# Altium PCB 第五版.pcbdoc
Units mm, origin at the board's own origin, x right, y up, seen from the top; angles counter-clockwise.
Board outline 187.55 x 125.98 mm, 2 copper layers (Top Layer, Bottom Layer); 78 components, 111 nets, 257 pads, 47 vias.
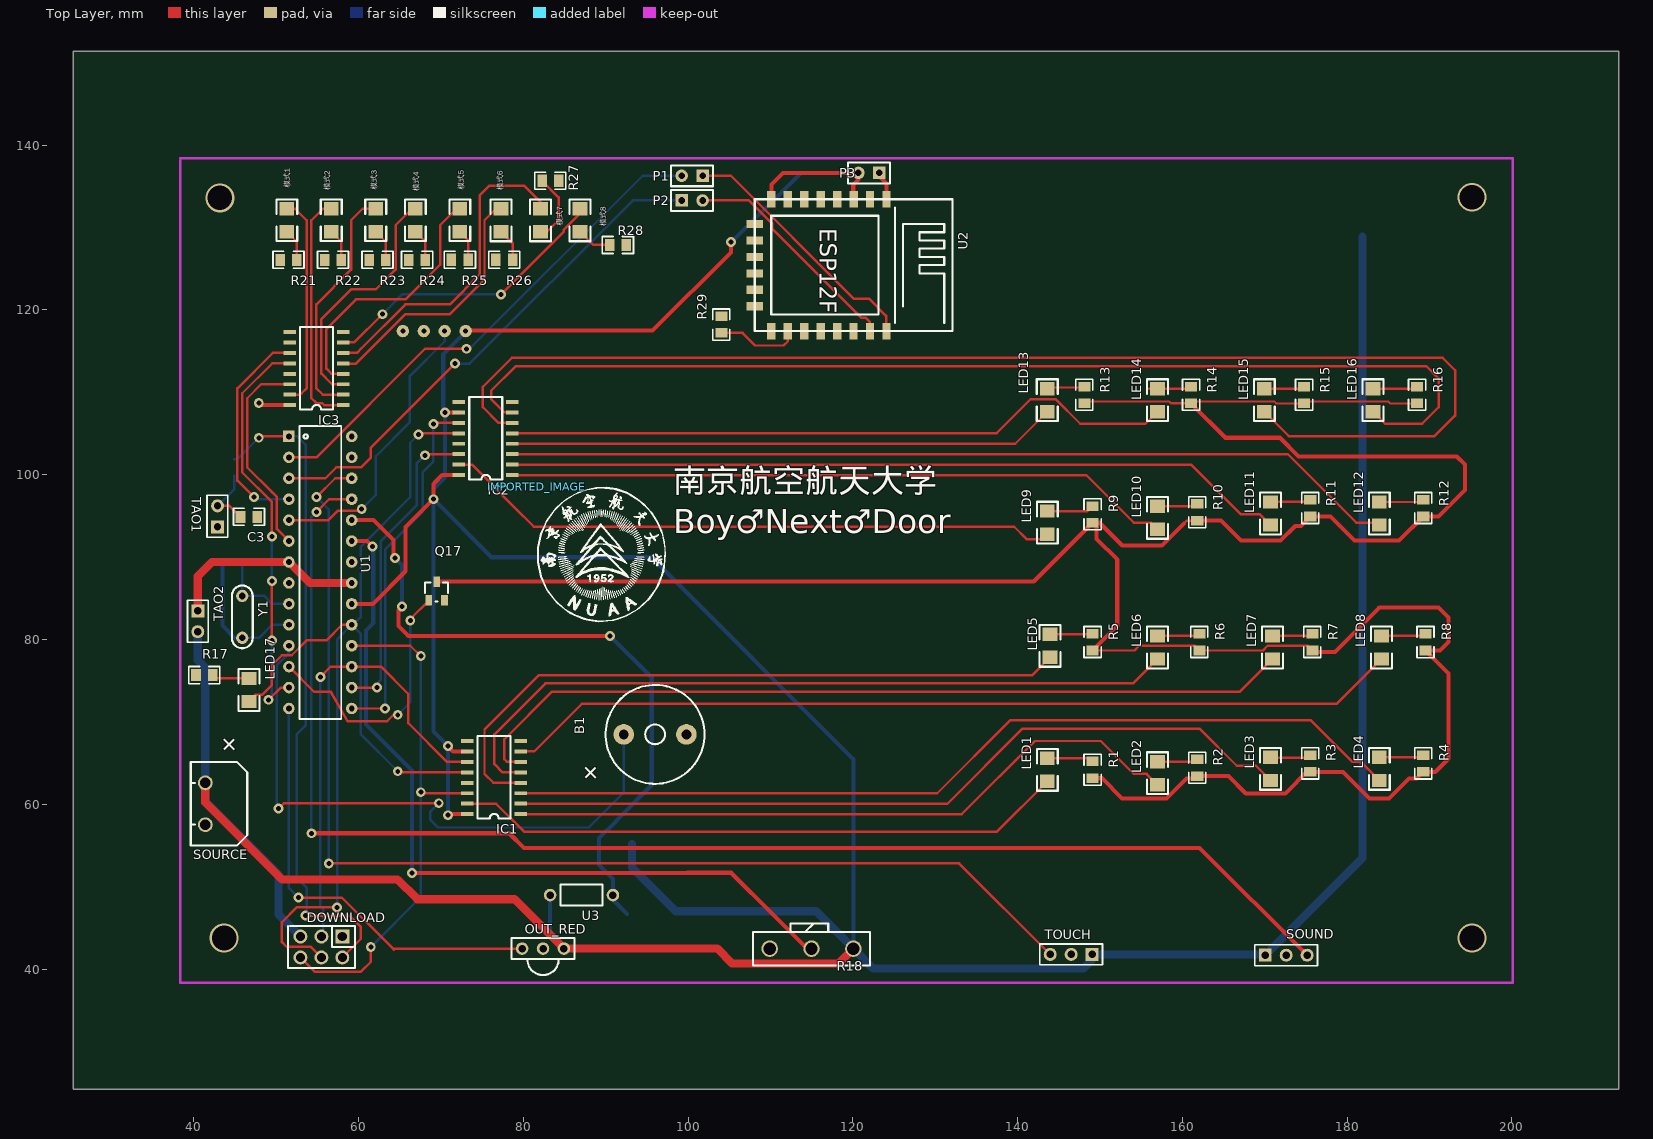
[diagram p0: Top Layer view]
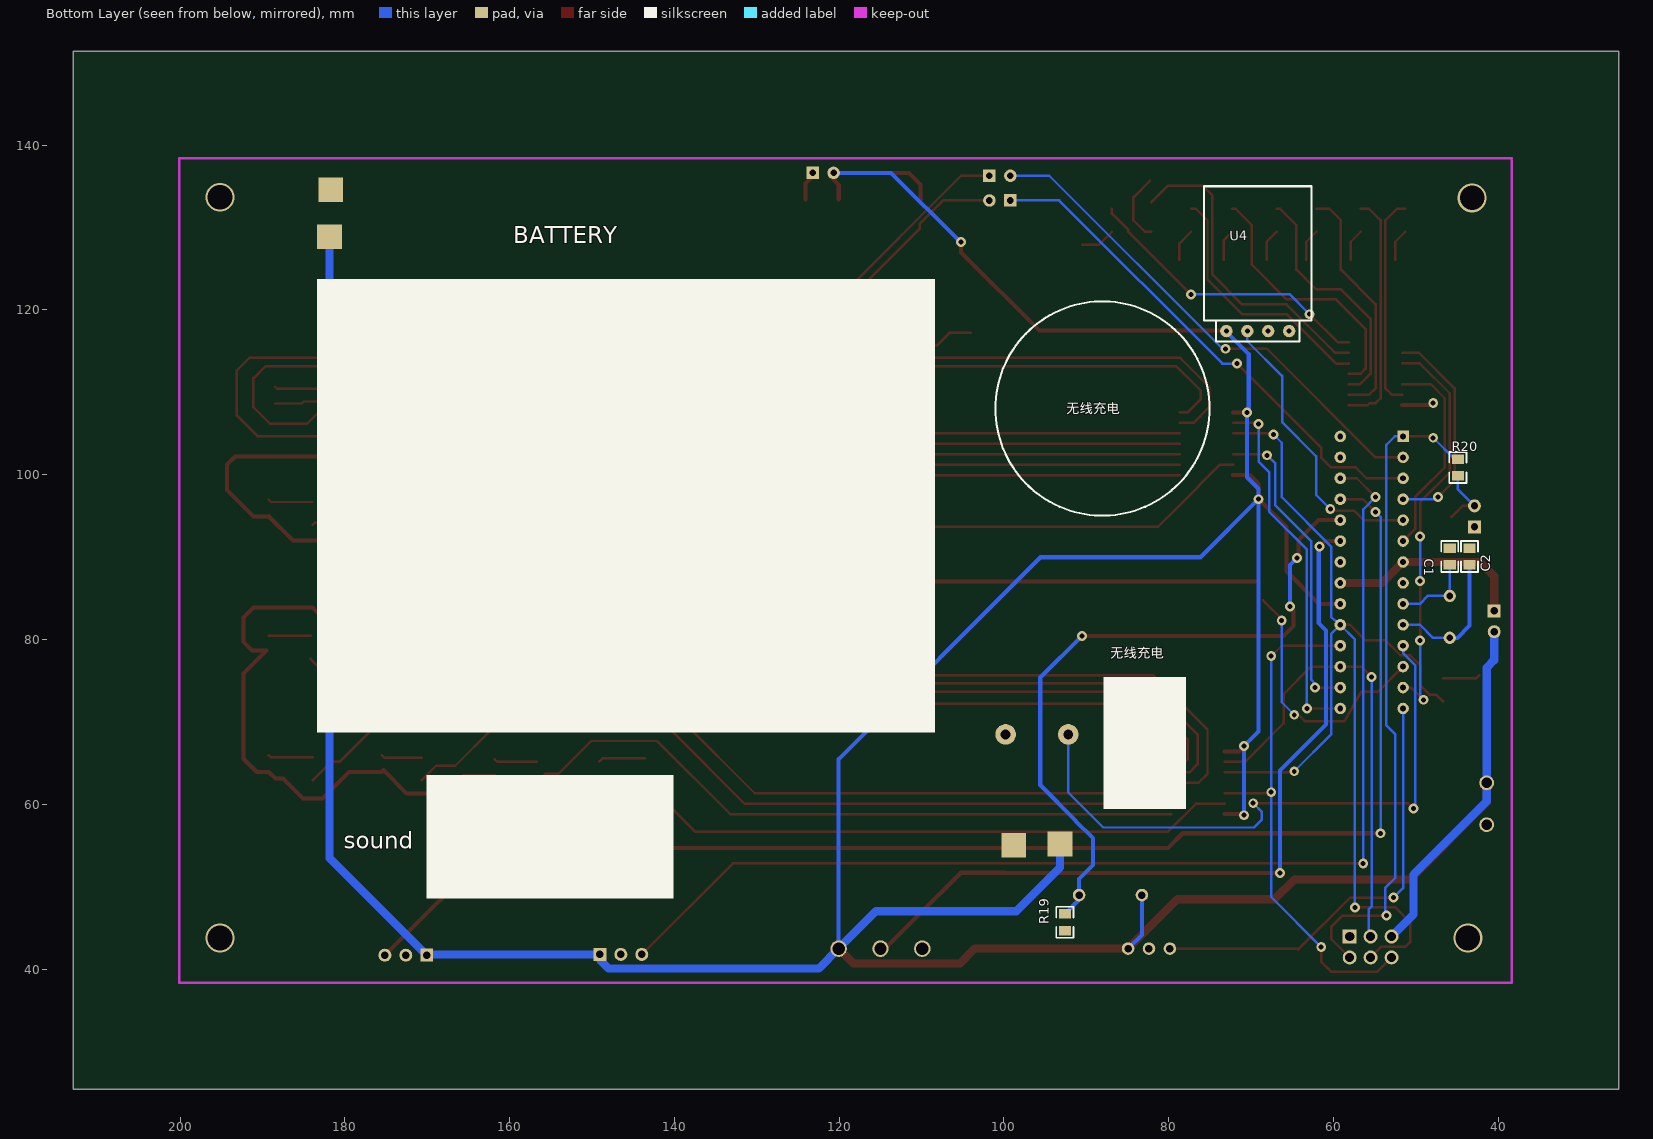
[diagram p1: Bottom Layer view, seen from below]

## Layer stack, top to bottom
Top Layer: signal copper (thickness not stored)
Dielectric: dielectric 0.32, FR-4, Dk 4.8
Bottom Layer: signal copper (thickness not stored)

## Board outline
212.949,25.4 25.4,25.4 25.4,151.382 212.949,151.382

## Components (designator, comment, footprint, x,y, rotation, side; value= is the part's Value field where it differs from the comment)
B1 "_" 蜂鸣器 96.002,68.483 r90 top
C1 "22p" 0805#1 45.901,90.083 r270 bottom
C2 "22p" 0805#1 43.5,90.083 r270 bottom
C3 "100nF" 0805#2 46.702,94.883 r180 top
DOWNLOAD "M_2.54_2*3P_JX" DIP-2X3P2.54 55.5,42.684 r180 top
IC1 "74HC595" SOP16L#1 76.454,63.246 r180 top
IC2 "74HC595" SOP16L#1 75.438,104.394 r180 top
IC3 "74HC595" SOP16L#2 54.9,112.884 r180 top
IMPORTED_IMAGE "IMPORTED_IMAGE" IMPORTED_IMAGE 81.631,98.547 r0 top
LED1 "_" 1206#1 143.602,64.183 r90 top
LED2 "_" 1206#1 156.977,63.771 r90 top
LED3 "_" 1206#1 170.692,64.302 r90 top
LED4 "_" 1206#1 183.9,64.302 r90 top
LED5 "_" 1206#1 143.947,79.238 r90 top
LED6 "_" 1206#1 156.977,79.04 r90 top
LED7 "_" 1206#1 170.947,79.04 r90 top
LED8 "_" 1206#1 184.155,79.04 r90 top
LED9 "_" 1206#1 143.602,94.183 r90 top
LED10 "_" 1206#1 156.977,94.772 r90 top
LED11 "_" 1206#1 170.693,95.303 r90 top
LED12 "_" 1206#1 183.901,95.303 r90 top
LED13 "_" 1206#1 143.6,109.042 r90 top
LED14 "_" 1206#1 156.977,109.042 r90 top
LED15 "_" 1206#1 169.944,109.042 r90 top
LED16 "_" 1206#1 183.152,109.042 r90 top
LED17 "led-3" 1206#1 46.702,73.883 r90 top
OUT_RED "HS0038B3VM" HS0038B3VM 82.402,42.483 r0 top
P1 "RX" 2.54-1*2P_TIGHT_JX#1 100.5,136.284 r180 top
P2 "TX" 2.54-1*2P_TIGHT_JX#2 100.5,133.284 r0 top
P3 "REST" 2.54-1*2P_TIGHT_JX#3 121.95,136.634 r180 top
Q17 "AO3400" SOT-23 69.502,85.883 r0 top
R1 "220" 0805#2 149.102,64.183 r270 top
R2 "220" 0805#2 161.802,64.437 r270 top
R3 "220" 0805#2 175.518,64.945 r270 top
R4 "220" 0805#2 189.234,64.945 r270 top
R5 "220" 0805#2 149.102,79.683 r270 top
R6 "220" 0805#2 162.056,79.682 r270 top
R7 "220" 0805#2 175.772,79.682 r270 top
R8 "220" 0805#2 189.504,79.681 r270 top
R9 "220" 0805#3 149.102,95.183 r270 top
R10 "220" 0805#3 161.802,95.437 r270 top
R11 "220" 0805#3 175.518,95.945 r270 top
R12 "220" 0805#3 189.234,95.945 r270 top
R13 "220" 0805#3 148.1,109.684 r270 top
R14 "220" 0805#3 161.054,109.684 r270 top
R15 "220" 0805#3 174.77,109.684 r270 top
R16 "220" 0805#3 188.486,109.684 r270 top
R17 "220" 0805#2 41.302,75.683 r0 top
R18 "100k" 单联电位器 112.452,42.483 r180 top
R19 "47k" 0805#4 92.6,45.684 r270 bottom
R20 "10k" 0805#1 44.902,100.883 r270 bottom
R21 "220" 0805#2 51.502,126.083 r180 top
R22 "220" 0805#2 56.902,126.083 r180 top
R23 "220" 0805#2 62.302,126.083 r180 top
R24 "220" 0805#3 67.102,126.083 r180 top
R25 "220" 0805#2 72.3,126.084 r180 top
R26 "220" 0805#2 77.7,126.084 r180 top
R27 "220" 0805#2 83.302,135.682 r0 top
R28 "220" 0805#2 91.5,127.884 r0 top
R29 "4.7k" 0805#5 104.05,118.234 r90 top
SOUND "Header-Male-2.54_1x3" HDR-3X1/2.54 172.6,41.684 r0 top
SOURCE "WJ2EDGVC-5.08-2P" 接线端子 46.5,57.684 r270 top
TAO1 "Header-Female-2.54_1x2" HDR-1X2/2.54#1 42.9,93.684 r90 top
TAO2 "Header-Female-2.54_1x2" HDR-1X2/2.54#2 40.5,83.484 r270 top
TOUCH "Header-Male-2.54_1x3" HDR-3X1/2.54 146.502,41.783 r180 top
U1 "ATMEGA328P-PU" DIP28-300 55.371,88.138 r270 top
U2 "ESP-12F(ESP8266MOD)" ESP-12F(ESP8266MOD) 116.1,125.434 r270 top
U3 "_" 电阻 88.35,48.984 r0 top
U4 "DHT11" DHT11_JX 69.2,117.434 r0 bottom
Y1 "16M" 晶振 45.9,85.284 r270 top
模式1 "_" 1206#2 51.3,130.884 r270 top (schematic designator ģʽ1)
模式2 "_" 1206#2 56.7,130.884 r270 top (schematic designator ģʽ2)
模式3 "_" 1206#2 62.1,130.884 r270 top (schematic designator ģʽ3)
模式4 "_" 1206#2 66.901,130.884 r270 top (schematic designator ģʽ4)
模式5 "_" 1206#2 72.301,130.884 r270 top (schematic designator ģʽ5)
模式6 "_" 1206#2 77.302,130.881 r270 top (schematic designator ģʽ6)
模式7 "_" 1206#2 82.103,130.881 r270 top (schematic designator ģʽ7)
模式8 "_" 1206#2 86.901,130.881 r270 top (schematic designator ģʽ8)

## Footprints (in the part's own frame and the unit in brackets; to place one, negate y for a bottom-side part, rotate by r counter-clockwise, add the part's x,y. Pads: shape width x height; smd on the part's side, far side on the other; paste and mask are expansions set on the pad)
2.54-1*2P_TIGHT_JX#1 [mm]
  rect 1.52x1.52 hole 0.81: 1(-1.269,0.002)
  round 1.52 hole 0.81: 2(1.27,0)
  silkscreen extent -2.54,-1.27 2.54,1.27
2.54-1*2P_TIGHT_JX#2 [mm]
  rect 1.52x1.52 hole 0.81: 1(-1.271,0)
  round 1.52 hole 0.81: 2(1.27,0)
  silkscreen extent -2.54,-1.27 2.54,1.27
2.54-1*2P_TIGHT_JX#3 [mm]
  rect 1.52x1.52 hole 0.81: 1(-1.269,-0.001)
  round 1.52 hole 0.81: 2(1.27,0)
  silkscreen extent -2.54,-1.27 2.54,1.27
0805#1 [mm]
  rect 1.16x1.47 smd: 1(1.017,-0.001) 2(-1.015,-0.001)
  silkscreen extent -1.87,-1.04 1.9,1.03
0805#2 [mm]
  rect 1.16x1.47 smd: 1(-1.016,0) 2(1.016,0)
  silkscreen extent -1.9,-1.04 1.87,1.03
0805#3 [mm]
  rect 1.16x1.47 smd: 1(-1.017,0.001) 2(1.015,0.001)
  silkscreen extent -1.9,-1.03 1.87,1.04
0805#4 [mm]
  rect 1.16x1.47 smd: 1(1.015,0) 2(-1.017,0)
  silkscreen extent -1.88,-1.04 1.9,1.03
0805#5 [mm]
  rect 1.16x1.47 smd: 1(-1.016,0.002) 2(1.016,0.002)
  silkscreen extent -1.9,-1.03 1.87,1.04
1206#1 [mil]
  rect 63x70.9 smd: 1(-55.01,-0.01) 2(54.99,-0.01)
  silkscreen extent -100,-50 100,50
1206#2 [mil]
  rect 63x70.9 smd: 1(-55,0.05) 2(55,0.05)
  silkscreen extent -100,-50 100,50
DHT11_JX [mm]
  round 1.5 hole 0.6: 1(3.81,0) 2(1.27,0) 3(-1.27,0) 4(-3.81,0)
  silkscreen extent -6.51,-17.58 6.51,1.27
DIP28-300 [mil]
  rect 55x55 hole 28: 1(-650.02,-149.96)
  round 55 hole 28: 2(-550,-150) 3(-450,-150) 4(-350,-150) 5(-250,-150) 6(-150,-150) 7(-50,-150) 8(50,-150) 9(150,-150) 10(250,-150) 11(350,-150) 12(450,-150) 13(550,-150) 14(650,-150) 15(650,150) 16(550,150) 17(450,150) 18(350,150) 19(250,150) 20(150,150) 21(50,150) 22(-50,150) 23(-150,150) 24(-250,150) 25(-350,150) 26(-450,150) 27(-550,150) 28(-650,150)
  silkscreen extent -700,-100 700,100
DIP-2X3P2.54 [mm]
  rect 1.7x1.7 hole 1.1: 1(-2.538,-1.269)
  round 1.7 hole 1.1: 2(-2.54,1.27) 3(0,-1.27) 4(0,1.27) 5(2.54,-1.27) 6(2.54,1.27)
  silkscreen extent -4.06,-2.54 4.06,2.54
ESP-12F(ESP8266MOD) [mm]
  rect 2x1 smd: 1(-8.001,8.001) 2(-8.001,6.002) 3(-8.001,4.002) 4(-8.001,2.001) 5(-8.001,0) 6(-8.001,-1.999) 7(-8.001,-3.998) 8(-8.001,-6) 15(7.999,-6.005) 16(8,-4.001) 17(8.003,-2.002) 18(8.001,-0.002) 19(8,1.999) 20(8.001,3.998) 21(8.001,5.999) 22(8.001,7.998)
  rect 1x2 smd: 9(-5,-8) 10(-3.002,-7.999) 11(-1.003,-7.999) 12(0.999,-7.999) 13(2.998,-7.999) 14(4.997,-8)
  silkscreen extent -8,-8 8,16
HDR-1X2/2.54#1 [mil]
  rect 62x62 hole 35: 1(-0.05,0.08)
  round 62 hole 35: 2(100,0.01)
  silkscreen extent -50,-49 150,50
HDR-1X2/2.54#2 [mil]
  rect 62x62 hole 35: 1(-0.02,0.01)
  round 62 hole 35: 2(100,0)
  silkscreen extent -50,-49 150,50
HDR-3X1/2.54 [mil]
  rect 62x62 hole 35: 1(-100.01,-0.04)
  round 62 hole 35: 2(0.01,0) 3(100.01,0)
  silkscreen extent -150,-50 150,50
HS0038B3VM [mil]
  round 60 hole 36: 1(-100,0) 2(0,0) 3(100,0)
  silkscreen extent -150,-126 150,50
IMPORTED_IMAGE [mm]
  silkscreen extent 0.04,-16.43 15.69,0
SOP16L#1 [mm]
  rect 1.52x0.48 smd: 1(-3.239,4.444) 2(-3.239,3.174) 3(-3.239,1.906) 4(-3.239,0.636) 5(-3.239,-0.634) 6(-3.239,-1.904) 7(-3.239,-3.174) 8(-3.239,-4.444) 9(3.238,-4.444) 10(3.238,-3.174) 11(3.238,-1.904) 12(3.238,-0.634) 13(3.238,0.636) 14(3.238,1.906) 15(3.238,3.176) 16(3.238,4.444)
  silkscreen extent -2.02,-5.05 1.99,4.95
SOP16L#2 [mm]
  rect 1.52x0.48 smd: 1(-3.238,4.445) 2(-3.238,3.175) 3(-3.238,1.905) 4(-3.238,0.635) 5(-3.238,-0.635) 6(-3.238,-1.905) 7(-3.238,-3.175) 8(-3.238,-4.445) 9(3.239,-4.445) 10(3.239,-3.175) 11(3.239,-1.905) 12(3.239,-0.635) 13(3.239,0.635) 14(3.239,1.905) 15(3.239,3.175) 16(3.239,4.445)
  silkscreen extent -2.02,-5.05 1.99,4.95
SOT-23 [mm]
  rect 0.81x1.27 smd: 1(-0.952,-1.143) 2(0.953,-1.143) 3(-0.013,1.143)
  silkscreen extent -1.41,-1.27 1.38,1.02
单联电位器 [mm]
  round 2 hole 1.5: 1(-7.62,0) 2(-2.54,0) 3(2.54,0)
  silkscreen extent -9.65,-3.05 4.57,2.03
接线端子 [mm]
  round 1.8 hole 1.25: 1(-4.92,-5.08) 2(0.16,-5.08)
  silkscreen extent -7.46,-6.86 2.7,0
晶振 [mm]
  round 1.5 hole 0.8: 1(0,0) 2(5.08,0)
  silkscreen extent -1.27,-1.27 6.35,1.27
电阻 [mil]
  round 60 hole 36: 1(-200,0) 2(100,0)
  silkscreen extent -150,-50 50,50
蜂鸣器 [mm]
  round 2.5 hole 1.199: 1(0,3.8) 2(0,-3.8)
  silkscreen extent -6,-6 6,6

## Free pads (board coordinates)
  rect 3x3 smd far side: 2(93.201,55.183) 2(98.801,55.035) 2(181.703,134.583) 2(181.851,128.883)

## Via types
v1: diameter 1.2, hole 0.605, Top Layer to Bottom Layer, 41 vias
v2: diameter 3.5, hole 3, Top Layer to Bottom Layer, 4 vias
v3: diameter 1.2, hole 0.6, Top Layer to Bottom Layer, 2 vias

## Nets (pads, with @x,y where several pads share a name; then routed paths per layer and width w, separated by ;. In a path a pad name is that pad's centre, name@x,y a point inside that pad or via, vN(x,y) a via of type N, cw(c..) or ccw(c..) an arc to the next point about the centre after c; other vN are vias at no path point)
+5V: DOWNLOAD.5 IC1.10 IC1.16 IC2.10 IC2.16 IC3.10 IC3.16 OUT_RED.3 P3.2 pad.2@93.201,55.183 pad.2@181.851,128.883 R18.1 SOUND.1 SOURCE.1 TAO2.2 TOUCH.1 U1.20 U2.3 U2.8 U3.1 U4.1 | length 573.1
  Top Layer w0.5: v1(47.902,108.683) 48.146,108.44 IC3.16@51.661,108.44 ; U1.20 61.742,84.328 65.7,88.285 65.7,93.64 v1(69.088,97.028) ; v1@69.299,97.239 v1(69.088,97.028) ; v1@70.358,107.442 v1(70.485,107.569) IC2.10 ; v1(70.866,58.674) 70.993,58.801 IC1.16 ; v1(70.866,67.056) 71.501,66.421 IC1.10 ; IC2.16 70.165,99.949 69.299,99.083 69.088,98.872 v1(69.088,97.028) ; U4.1 73.06,117.484 95.7,117.484 105.202,126.986 v1(105.202,128.232) ; U2.8@110.1,133.435 110.15,133.486 110.15,135.234 111.55,136.634 P3.2 120.68,135.814 120.05,135.184 120.05,133.486 U2.3@120.101,133.435
  Top Layer w1: SOURCE.1 41.42,60.214 50.75,50.884 64.75,50.884 67.15,48.484 78.941,48.484 OUT_RED.3 ; OUT_RED.3@84.942,42.483 103.551,42.483 105.35,40.684 118.273,40.684 R18.1@120.072,42.483
  Bottom Layer w0.5: v1(70.866,58.674) v1(70.866,67.056) 69.088,68.834 v1(69.088,97.028) ; U4.1 73.01,117.344 70.3,114.634 70.3,107.754 v1(70.485,107.569) 70.485,99.695 69.088,98.298 v1(69.088,97.028) ; U3.1 83.27,44.155 OUT_RED.3@84.942,42.483 ; v1(105.202,128.232) 105.298,128.232 113.7,136.634 P3.2 ; R18.1@120.072,42.483 120.072,65.462 95.55,89.984 76.132,89.984 v1(69.088,97.028)
  Bottom Layer w1: TAO2.2 40.5,77.485 41.42,76.563 SOURCE.1 41.42,60.401 41.402,60.383 50.292,51.493 50.292,46.622 DOWNLOAD.5 ; pad.2@93.2,55.184 93.2,52.334 98.501,47.033 113.149,47.033 115.522,47.033 120.071,42.481 122.471,40.084 147.998,40.084 149.042,41.128 TOUCH.1 169.959,41.783 SOUND.1 ; SOUND.1 181.85,53.473 pad.2@181.85,128.884
BUTTON: TOUCH.3 U1.26 | length 142.4
  Top Layer w0.3: v1(54.9,97.284) 57.183,99.568 U1.26 ; v1(56.402,52.833) 132.912,52.833 TOUCH.3
  Bottom Layer w0.3: v1(54.9,97.284) 56.402,95.782 v1(56.402,52.833)
CLK_1: DOWNLOAD.3 IC1.11 U1.17 | length 57.1
  Top Layer w0.3: v1(55.372,75.438) 56.642,76.708 U1.17 62.738,76.708 66.04,73.406 66.04,69.85 70.739,65.151 IC1.11
  Bottom Layer w0.3: v1(55.372,75.438) 55.372,47.612 55.702,47.282 55.702,43.955 DOWNLOAD.3
CLK_2: IC2.11 U1.15 | length 44.2
  Top Layer w0.3: U1.15 v1(63.246,71.628) ; v1(69.088,106.172) 69.215,106.299 IC2.11
  Bottom Layer w0.3: v1(63.246,71.628) 63.246,88.138 63.246,89.154 63.246,90.932 67.818,95.504 67.818,100.33 69.088,101.6 v1(69.088,106.172)
CLK_3: IC3.11 U1.4 | length 26.5
  Top Layer w0.3: v1(47.302,97.283) 45.301,99.284 45.301,110.485 49.604,114.788 IC3.11
  Bottom Layer w0.3: v1(47.302,97.283) 47.556,97.028 U1.4
DATA_1: DOWNLOAD.6 IC1.14 U1.18 | length 64
  Top Layer w0.3: DOWNLOAD.6 54.689,39.685 60.3,39.685 61.501,40.884 v3(61.5,42.684) ; U1.18 66.294,79.248 v1(67.564,77.978) ; v1(67.564,61.468) 67.691,61.341 IC1.14
  Bottom Layer w0.3: v3(61.5,42.684) 67.564,48.748 v1(67.564,61.468) v1(67.564,77.978)
DATA_2: IC2.14 U1.16 | length 37.8
  Top Layer w0.3: U1.16 v1(62.23,74.168) ; v1(68.072,102.362) 68.199,102.489 IC2.14
  Bottom Layer w0.3: v1(62.23,74.168) 62.23,74.615 62.7,75.085 62.7,91.91 67.056,96.266 67.056,101.346 v1(68.072,102.362)
DATA_3: IC3.14 U1.6 | length 25.3
  Top Layer w0.3: U1.6 50.099,93.408 50.099,97.285 49.5,97.884 46.5,100.884 46.5,104.483 46.5,109.283 48.194,110.978 IC3.14
DHT11: U1.5 U4.2 | length 35.2
  Top Layer w0.3: U1.5 56.353,94.487 57.5,95.634 60.2,95.634 v1(60.4,95.834)
  Bottom Layer w0.3: v1(60.4,95.834) 62.1,97.534 62.1,102.234 66.25,106.384 66.25,111.984 70.47,116.204 U4.2
GND: B1.2 C1.2 C2.2 C3.1 DOWNLOAD.1 IC1.8 IC1.13 IC2.8 IC2.13 IC3.8 IC3.13 OUT_RED.2 pad.2@98.801,55.035 pad.2@181.703,134.583 Q17.2 R17.1 R18.3 R19.1 R21.2 R22.2 R23.2 R24.2 R25.2 R26.2 R27.2 R28.2 R29.2 SOUND.2 SOURCE.2 TAO1.1 TOUCH.2 U1.8 U1.22 U2.15 U4.4
IC1_9: IC1.9
IC2_9: IC2.9
IC3_9: IC3.9
L1: IC1.15 LED1.1 | length 74.3
  Top Layer w0.3: IC1.15 76.714,60.07 80.1,56.684 137.5,56.684 LED1.1
L2: IC1.1 LED2.1 | length 83.2
  Top Layer w0.3: IC1.1 133.218,58.801 142.1,67.683 150.099,67.683 154.099,63.685 155.666,63.685 LED2.1
L3: IC1.2 LED3.1 | length 97.4
  Top Layer w0.3: IC1.2 102.911,60.071 131.486,60.071 140.599,69.185 162.1,69.185 166.599,64.684 168.913,64.684 LED3.1
L4: IC1.3 LED4.1 | length 110.9
  Top Layer w0.3: IC1.3@79.692,61.338 116.045,61.338 130.254,61.338 139.101,70.185 175.6,70.185 180.599,65.184 181.62,65.184 LED4.1
L5: IC1.4 LED5.1 | length 82.5
  Top Layer w0.3: IC1.4 76.375,62.611 75.301,63.685 75.301,69.083 81.892,75.684 85.184,75.684 141.79,75.684 LED5.1
L6: IC1.5 LED6.1 | length 91.8
  Top Layer w0.3: IC1.5 77.503,63.881 76.5,64.884 76.5,68.483 82.7,74.684 96.901,74.684 ; 96.599,74.684 154.018,74.684 LED6.1
L7: IC1.6 LED7.1 | length 101.8
  Top Layer w0.3: IC1.6@79.692,65.148 78.034,65.148 77.701,65.484 77.701,67.884 83.5,73.683 109.982,73.683 166.987,73.683 LED7.1
L8: IC1.7 LED8.1 | length 109.1
  Top Layer w0.3: IC1.7 81.335,66.42 87.1,72.184 178.696,72.184 LED8.1
L9: IC2.15 LED9.1 | length 75.4
  Top Layer w0.3: IC2.15 73.767,101.219 78.9,96.083 81.3,93.683 139.601,93.683 141.1,92.184 143,92.184 LED9.1
L10: IC2.1 LED10.1 | length 81
  Top Layer w0.3: IC2.1 148.334,99.95 154.1,94.184 156.168,94.184 LED10.1
L11: IC2.2 LED11.1 | length 95
  Top Layer w0.3: IC2.2 161.064,101.22 167.1,95.184 169.415,95.184 LED11.1
L12: IC2.3 LED12.1 | length 108.8
  Top Layer w0.3: IC2.3 172.796,102.488 181.1,94.184 183.623,94.184 LED12.1
L13: IC2.4 LED13.1 | length 66.5
  Top Layer w0.3: IC2.4 139.712,103.758 LED13.1
L14: IC2.5 LED14.1 | length 81.9
  Top Layer w0.3: IC2.5 137.444,105.029 141.6,109.184 144.6,109.184 147.599,106.185 155.517,106.185 LED14.1
L15: IC2.6 LED15.1 | length 157.8
  Top Layer w0.3: IC2.6 76.987,106.299 75.1,108.184 75.1,110.683 78.6,114.183 191.6,114.183 193.098,112.685 193.098,107.183 190.599,104.684 172.905,104.684 LED15.1
L16: IC2.7 LED16.1 | length 134
  Top Layer w0.3: IC2.7 77.716,107.569 76.101,109.184 76.101,110.185 79.101,113.185 189.601,113.185 191.099,111.684 191.099,108.184 189.1,106.185 184.612,106.185 LED16.1
L17: IC3.15 模式1.1 | length 25.7
  Top Layer w0.3: 模式1.1@51.3,132.281 52.304,132.281 53.701,130.884 53.701,110.485 53.101,109.883 52.926,109.708 IC3.15
L18: IC3.1 模式2.1 | length 28.8
  Top Layer w0.3: 模式2.1@56.7,132.281 55.697,132.281 54.3,130.884 54.3,109.283 54.9,108.684 55.611,108.684 55.855,108.44 IC3.1@58.138,108.44
L19: IC3.2 模式3.1 | length 29.3
  Top Layer w0.3: IC3.2@58.138,109.71 55.674,109.71 54.9,110.485 54.9,120.683 59.101,124.884 59.101,130.884 60.498,132.281 模式3.1@62.1,132.281
L20: IC3.3 模式4.1 | length 29.9
  Top Layer w0.3: IC3.3 56.805,110.978 56.7,111.084 55.499,112.283 55.499,118.885 59.101,122.484 62.1,122.484 64.501,124.884 64.501,130.284 66.497,132.281 模式4.1@66.901,132.281
L21: IC3.4 模式5.1 | length 32.2
  Top Layer w0.3: IC3.4 58.102,112.283 56.7,112.283 56.101,112.883 56.101,117.683 59.7,121.285 65.7,121.285 69.901,125.484 69.901,130.284 71.897,132.281 模式5.1@72.301,132.281
L22: IC3.5 模式6.1 | length 31.2
  Top Layer w0.3: IC3.5 58.174,113.485 59.7,113.485 65.7,119.484 71.1,119.484 75.301,123.683 75.301,130.884 76.695,132.281 模式6.1@77.302,132.281
L23: IC3.6 模式7.1 | length 38.8
  Top Layer w0.3: IC3.6 59.804,114.788 60.3,115.283 65.7,120.683 71.1,120.683 74.699,124.285 74.699,133.883 75.9,135.085 80.099,135.085 82.103,133.081
L24: IC3.7 模式8.1 | length 36
  Top Layer w0.3: IC3.7 59.479,116.058 v1(62.902,119.483) ; v1(77.302,121.882) 84.9,129.482 84.9,129.685 86.901,131.686 模式8.1@86.901,132.281
  Bottom Layer w0.3: v1(62.902,119.483) 65.301,121.882 v1(77.302,121.882)
LATCH: DOWNLOAD.4 IC1.12 IC2.12 LED17.1 U1.19 | length 128.5
  Top Layer w0.3: LED17.1@46.703,72.487 47.501,73.284 48.301,73.284 49.5,74.483 49.5,76.883 50.701,78.085 51.9,78.085 53.698,79.883 56.109,79.883 58.014,81.788 U1.19 ; DOWNLOAD.4 54.229,42.685 51.3,42.685 50.701,43.284 50.701,45.684 52.499,47.485 v1(57.404,47.484) ; v1(64.77,64.008) 64.897,63.881 IC1.12 ; v1(67.31,104.902) 67.437,105.029 IC2.12
  Bottom Layer w0.3: v1@57.404,47.244 57.404,64.77 57.404,66.548 57.404,80.01 U1.19 ; v1(64.77,64.008) 60.3,68.478 60.3,80.67 U1.19 ; v1(67.31,104.902) 66.294,103.886 66.294,97.277 60.3,91.285 60.3,82.746 U1.19
LATCH_2: IC3.12 U1.13 | length 49.2
  Top Layer w0.3: v1(49.102,72.683) 50.587,74.168 U1.13 ; v1(49.5,79.883) v1(49.5,87.084) ; v1(49.5,92.484) 49.5,96.685 45.9,100.284 45.9,109.883 49.535,113.518 50.135,113.518 IC3.12
  Bottom Layer w0.3: v1(49.102,72.683) 49.5,73.081 v1(49.5,79.883) ; v1(49.5,87.084) v1(49.5,92.484)
LED1_2: LED1.2 R1.1 | length 5.7
  Top Layer w0.3: LED1.2 148.721,65.579 R1.1
LED2_2: LED2.2 R2.1 | length 5.2
  Top Layer w0.3: LED2.2@156.722,65.168 161.515,65.168 R2.1@161.802,65.455
LED3_2: LED3.2 R3.1 | length 4.9
  Top Layer w0.3: LED3.2@170.692,65.676 175.231,65.676 R3.1@175.518,65.963
LED4_2: LED4.2 R4.1 | length 5.4
  Top Layer w0.3: LED4.2 188.97,65.699 R4.1@189.234,65.963
LED5_2: LED5.2 R5.1 | length 5.2
  Top Layer w0.3: LED5.2 149.038,80.635 R5.1
LED6_2: LED6.2 R6.1 | length 5.2
  Top Layer w0.3: LED6.2 161.794,80.437 R6.1
LED7_2: LED7.2 R7.1 | length 4.9
  Top Layer w0.3: LED7.2 175.51,80.437 R7.1
LED8_2: LED8.2 R8.1 | length 5.1
  Top Layer w0.3: LED8.2 R8.1@189.227,80.436
LED9_2: LED9.2 R9.1 | length 5.8
  Top Layer w0.3: LED9.2 148.483,95.579 R9.1@149.102,96.199
LED10_2: LED10.2 R10.1 | length 5.2
  Top Layer w0.3: LED10.2@156.722,96.169 161.516,96.169 R10.1@161.801,96.454
LED11_2: LED11.2 R11.1 | length 4.9
  Top Layer w0.3: LED11.2 175.255,96.7 R11.1@175.517,96.962
LED12_2: LED12.2 R12.1 | length 5.4
  Top Layer w0.254: LED12.2 188.972,96.7 R12.1@189.234,96.962
LED13_2: LED13.2 R13.1 | length 4.5
  Top Layer w0.254: LED13.2@143.6,110.581 147.981,110.581 R13.1
LED14_2: LED14.2 R14.1 | length 5.2
  Top Layer w0.254: 155.974,110.44 160.793,110.44 R14.1
LED15_2: LED15.2 R15.1 | length 4.9
  Top Layer w0.254: LED15.2 174.509,110.44 R15.1
LED16_2: LED16.2 R16.1 | length 5.4
  Top Layer w0.254: LED16.2 188.225,110.44 R16.1
LED17_2: LED17.2 R17.2 | length 4.6
  Top Layer w0.3: R17.2 42.72,75.281 LED17.2@46.703,75.281
LED18_2: R21.1 模式1.2 | length 3.9
  Top Layer w0.3: 模式1.2@51.3,129.487 52.517,128.27 R21.1@52.517,126.083
LED19_2: R22.1 模式2.2 | length 3.9
  Top Layer w0.3: 模式2.2@56.7,129.487 57.917,128.27 R22.1@57.917,126.083
LED20_2: R23.1 模式3.2 | length 3.9
  Top Layer w0.3: 模式3.2@62.1,129.487 63.317,128.27 R23.1@63.317,126.083
LED21_2: R24.1 模式4.2 | length 3.9
  Top Layer w0.3: 模式4.2@66.901,129.487 68.118,128.27 R24.1@68.118,126.083
LED22_2: R25.1 模式5.2 | length 3.8
  Top Layer w0.3: 模式5.2@72.301,129.487 73.317,128.471 R25.1@73.317,126.083
LED23_2: R26.1 模式6.2 | length 4
  Top Layer w0.3: 模式6.2@77.302,129.487 78.717,128.072 R26.1@78.717,126.083
LED24_2: R27.1 模式7.2 | length 8.4
  Top Layer w0.3: 模式7.2@82.103,129.487 82.901,129.487 84.3,130.884 84.3,133.667 R27.1
LED25_2: R28.1 模式8.2 | length 4.2
  Top Layer w0.3: 模式8.2@86.901,129.487 88.504,127.884 R28.1
R1_2: Q17.3 R1.2 R2.2 R3.2 R4.2 R5.2 R6.2 R7.2 R8.2 R9.2 R10.2 R11.2 R12.2 R13.2 R14.2 R15.2 R16.2 | length 353
  Top Layer w0.254: R13.2 148.344,108.91 158.374,108.91 158.615,108.669 R14.2 ; R14.2 161.296,108.911 171.154,108.911 171.396,108.668 R15.2 175.012,108.911 184.954,108.911 185.196,108.668 R16.2 ; R12.2 R12.2@189.234,95.115
  Top Layer w0.3: R5.2 154.174,78.667 154.746,79.238 161.484,79.238 R6.2 169.775,78.667 170.346,79.238 175.2,79.238 R7.2 ; 160.202,94.099 160.525,94.422 R10.2@161.801,94.422
  Top Layer w0.5: Q17.3 85.441,87.025 141.96,87.025 R9.2 ; R1.2 150.253,63.167 152.691,60.726 158.091,60.726 160.491,63.126 161.505,63.126 161.802,63.423 165.597,63.423 167.692,61.328 172.493,61.328 175.307,64.142 175.518,63.931 179.488,63.931 182.091,61.328 182.691,60.726 185.091,60.726 187.491,63.126 188.431,63.126 189.234,63.931 190.694,63.931 192.292,65.526 192.292,75.877 R8.2 ; R5.2 149.102,78.686 152.1,81.684 152.1,89.684 149.6,92.184 149.6,93.67 R9.2 ; 160.202,94.099 157.502,91.399 152.701,91.399 149.933,94.168 R9.2 ; R14.2 165.239,104.484 171.85,104.484 174.1,102.234 193.3,102.234 194.3,101.234 194.3,98.134 191.096,94.931 R12.2 ; R10.2@161.801,94.422 164.678,94.422 167.102,91.999 171.902,91.999 173.702,93.799 174.386,93.799 175.517,94.93 177.969,94.93 180.901,91.998 186.301,91.998 R12.2 ; R7.2@175.772,78.668 175.958,78.483 178.503,78.483 183.9,83.883 191.106,83.883 192.303,82.684 192.303,79.681 191.284,78.665 R8.2
R20_1: C3.2 R20.1 TAO1.2 | length 7.8
  Top Layer w0.3: TAO1.2@42.901,96.223 44.346,96.223 C3.2@45.687,94.882
  Bottom Layer w0.3: TAO1.2@42.901,96.223 44.902,98.227 R20.1@44.902,99.865
R29_1: R29.1 U2.16 | length 10.1
  Top Layer w0.3: R29.1 106.617,117.218 108.151,115.684 111.3,115.684 111.6,115.684 112.1,116.185 U2.16@112.098,117.434
RESET: DOWNLOAD.2 R20.2 U1.1 | length 80.3
  Top Layer w0.3: v1(47.902,104.483) 48.067,104.648 U1.1 ; v3(53.594,46.482) 58.903,46.482 60.3,45.085 60.3,43.675 DOWNLOAD.2
  Bottom Layer w0.3: R20.2@44.902,101.897 45.319,101.897 v1(47.902,104.483) ; U1.1 52.578,104.648 53.594,103.632 53.594,69.578 52.499,68.483 52.499,51.084 53.701,49.883 53.701,46.589 v3(53.594,46.482)
RX: P1.1 U2.22 | length 31.2
  Top Layer w0.3: P1.1@101.77,136.281 105.202,136.281 120.099,121.384 121.95,121.384 124.05,119.284 124.05,117.481 U2.22@124.098,117.433
RX_1: P1.2 U1.2 | length 61.8
  Top Layer w0.3: U1.2 54.922,102.108 68.1,115.283 v1(73.102,115.282)
  Bottom Layer w0.3: v1(73.102,115.282) 73.497,115.283 94.501,136.284 P1.2
S$17: 
S$19: 
S$21: 
S$32: 
S$34: 
S$36: 
S$38: 
S$40: 
S$920: 
S$922: 
S$924: 
SOUND: SOUND.3 U1.25 | length 171.1
  Top Layer w0.3: v1(54.9,95.484) 56.444,97.028 U1.25
  Top Layer w0.5: v1(54.3,56.484) 78.301,56.485 80.101,54.684 162.1,54.684 175.1,41.684 SOUND.3
  Bottom Layer w0.3: v1(54.3,56.484) 54.3,94.884 v1(54.9,95.484)
SOUNDOUT: B1.1 U1.11 | length 75.3
  Top Layer w0.3: v1(50.302,59.483) 50.953,60.133 v1(69.752,60.133)
  Bottom Layer w0.3: v1(50.302,59.483) 50.099,59.685 50.099,76.883 51.562,78.346 U1.11 ; v1(69.752,60.133) 68.699,59.08 68.699,58.133 69.649,57.183 87.947,57.183 89.411,58.646 92.202,61.435 B1.1
TAOER: TAO2.1 U1.7 U1.21 | length 24.6
  Top Layer w1: TAO2.1 40.5,87.683 42.222,89.408 U1.7 54.102,86.868 U1.21
TX: P2.2 U2.21 | length 27.9
  Top Layer w0.3: P2.2 107.399,133.284 110.2,130.485 110.2,129.883 121.05,119.034 ; 121.049,119.035 121.6,119.035 122.05,118.585 122.05,117.483 U2.21@122.098,117.434
TX_1: P2.1 U1.3 | length 62.3
  Top Layer w0.3: U1.3 55.984,99.568 57.3,100.884 60.3,100.884 61.501,102.085 61.501,103.284 v1(71.7,113.484)
  Bottom Layer w0.3: v1(71.7,113.484) 73.5,113.485 93.299,133.284 P2.1@99.23,133.284
U1_9: C1.1 U1.9 Y1.1 | length 9.8
  Bottom Layer w0.3: C1.1@45.9,89.068 Y1.1 48.575,85.283 49.53,84.328 U1.9
U1_10: C2.1 U1.10 Y1.2 | length 17
  Bottom Layer w0.3: Y1.2 47.945,80.203 49.53,81.788 U1.10
  Bottom Layer w0.5: C2.1 43.5,81.684 44.981,80.203 Y1.2 Y1.2@45.58,80.203
U1_12: Q17.1 U1.12 | length 32.3
  Top Layer w0.3: U1.12 54.607,73.66 56.642,73.66 58.674,70.104 63.5,70.104 64.262,70.866 v1(64.77,70.866) ; v1(66.294,82.296) 66.294,82.484 Q17.1
  Bottom Layer w0.3: v1(64.77,70.866) 66.294,72.39 v1(66.294,82.296)
U1_14: OUT_RED.1 U1.14 | length 53.2
  Top Layer w0.3: v1(52.702,48.683) 57.968,48.682 57.97,48.684 64.295,42.36 64.418,42.483 OUT_RED.1
  Bottom Layer w0.3: U1.14 51.562,49.825 v1(52.702,48.683)
U1_23: R18.2 U1.23 | length 97.4
  Top Layer w0.5: U1.23 61.036,91.948 v1(61.702,91.283) ; v1@66.502,51.681 99.95,51.684 105.25,51.684 110.3,46.634 114.451,42.483 R18.2
  Bottom Layer w0.5: v1(61.702,91.283) 61.801,91.183 61.801,81.984 60.899,81.087 60.899,72.685 60.899,69.685 66.502,64.082 v1(66.502,51.683)
U1_24: R19.2 U1.24 U3.2 | length 83.2
  Top Layer w0.5: U1.24 61.847,94.487 64.25,92.084 64.25,90.085 v1(64.452,89.882) ; v1(65.3,83.984) 64.85,83.534 64.85,81.634 66.05,80.434 v1(90.55,80.434)
  Bottom Layer w0.5: v1(64.452,89.882) 65.3,89.035 v1(65.3,83.984) ; v1(90.55,80.434) 95.6,75.384 95.6,62.334 91.3,58.034 91.3,57.984 89.2,55.884 89.2,52.634 90.89,50.944 U3.2 90.89,48.412 R19.2
U1_27: U1.27
U1_28: U1.28
U2_1: P3.1 U2.1 | length 3.6
  Top Layer w0.5: P3.1@123.219,136.634 123.219,136.215 124.1,135.334 U2.1@124.1,133.436
U2_2: U2.2
U2_4: U2.4
U2_5: U2.5
U2_6: U2.6
U2_7: U2.7
U2_9: U2.9
U2_10: U2.10
U2_11: U2.11
U2_12: U2.12
U2_13: U2.13
U2_14: U2.14
U2_17: U2.17
U2_18: U2.18
U2_19: U2.19
U2_20: U2.20
U4_3: U4.3
copper on no net:
  other v2: 43.702,43.783 195.154,43.783 43.18,133.604 195.15,133.684

## Other copper
Top Layer:
  pour cut-out: 48.77,128.523 48.77,138.429 38.356,138.429 38.356,128.523 38.61,128.523
  pour cut-out: 38.354,48.514 48.514,48.514 48.514,38.354 38.1,38.354
  pour cut-out: 189.776,48.762 199.936,48.762 199.936,38.602 189.522,38.602
  pour cut-out: 189.776,138.262 199.936,138.262 199.936,128.102 189.522,128.102
Bottom Layer:
  pour cut-out: 38.354,48.514 48.514,48.514 48.514,38.354 38.1,38.1
  pour cut-out: 38.356,138.682 48.516,138.682 48.516,128.522 38.356,128.776
  pour cut-out: 189.776,48.762 199.936,48.762 199.936,38.602 189.522,38.348
  pour cut-out: 189.776,138.262 199.936,138.262 199.936,128.102 189.522,127.848

## Silkscreen, mask and mechanical layers (free items; w line width, h text height)
Top Overlay:
  text "南京航空航天大学 / Boy♂Next♂Door" at 98.193,91.93 h5
  text "+" at 44.152,65.761 h2.03 r45
Bottom Overlay:
  rectangle: 77.9,59.434 87.9,75.434
  circle w0.254: c88.05,108.034 r13
  rectangle: 140.102,48.583 170.102,63.583
  rectangle: 108.402,68.733 183.402,123.733
  text "BATTERY" at 159.586,128.11 h2.03
  text "无线充电" at 92.458,107.035 h2.03
  text "无线充电" at 87.08,77.341 h2.03
  text "sound" at 180.145,54.61 h2.03
Mechanical 3:
  lines w0.013: 69.301,87.846 69.352,87.795
Document:
  lines w0.003: 119.149,88.366 119.2,88.417

## Text inside footprints (layer, text, board x,y; h text height)
B1: Top Overlay "+" at 88.387,65.302 h2.03 r225
U2: Top Overlay "ESP12F" at 116.014,129.886 h2.03 r270